# Altium PCB UKU205m3.PcbDoc
Units mm, origin at the board's own origin, x right, y up, seen from the top; angles counter-clockwise.
Board outline 374.65 x 264.35 mm, 2 copper layers (Top Layer, Bottom Layer); 22 components, 433 nets, 213 pads, 41 vias.
Unrouted connection lines stored in the file: 51.
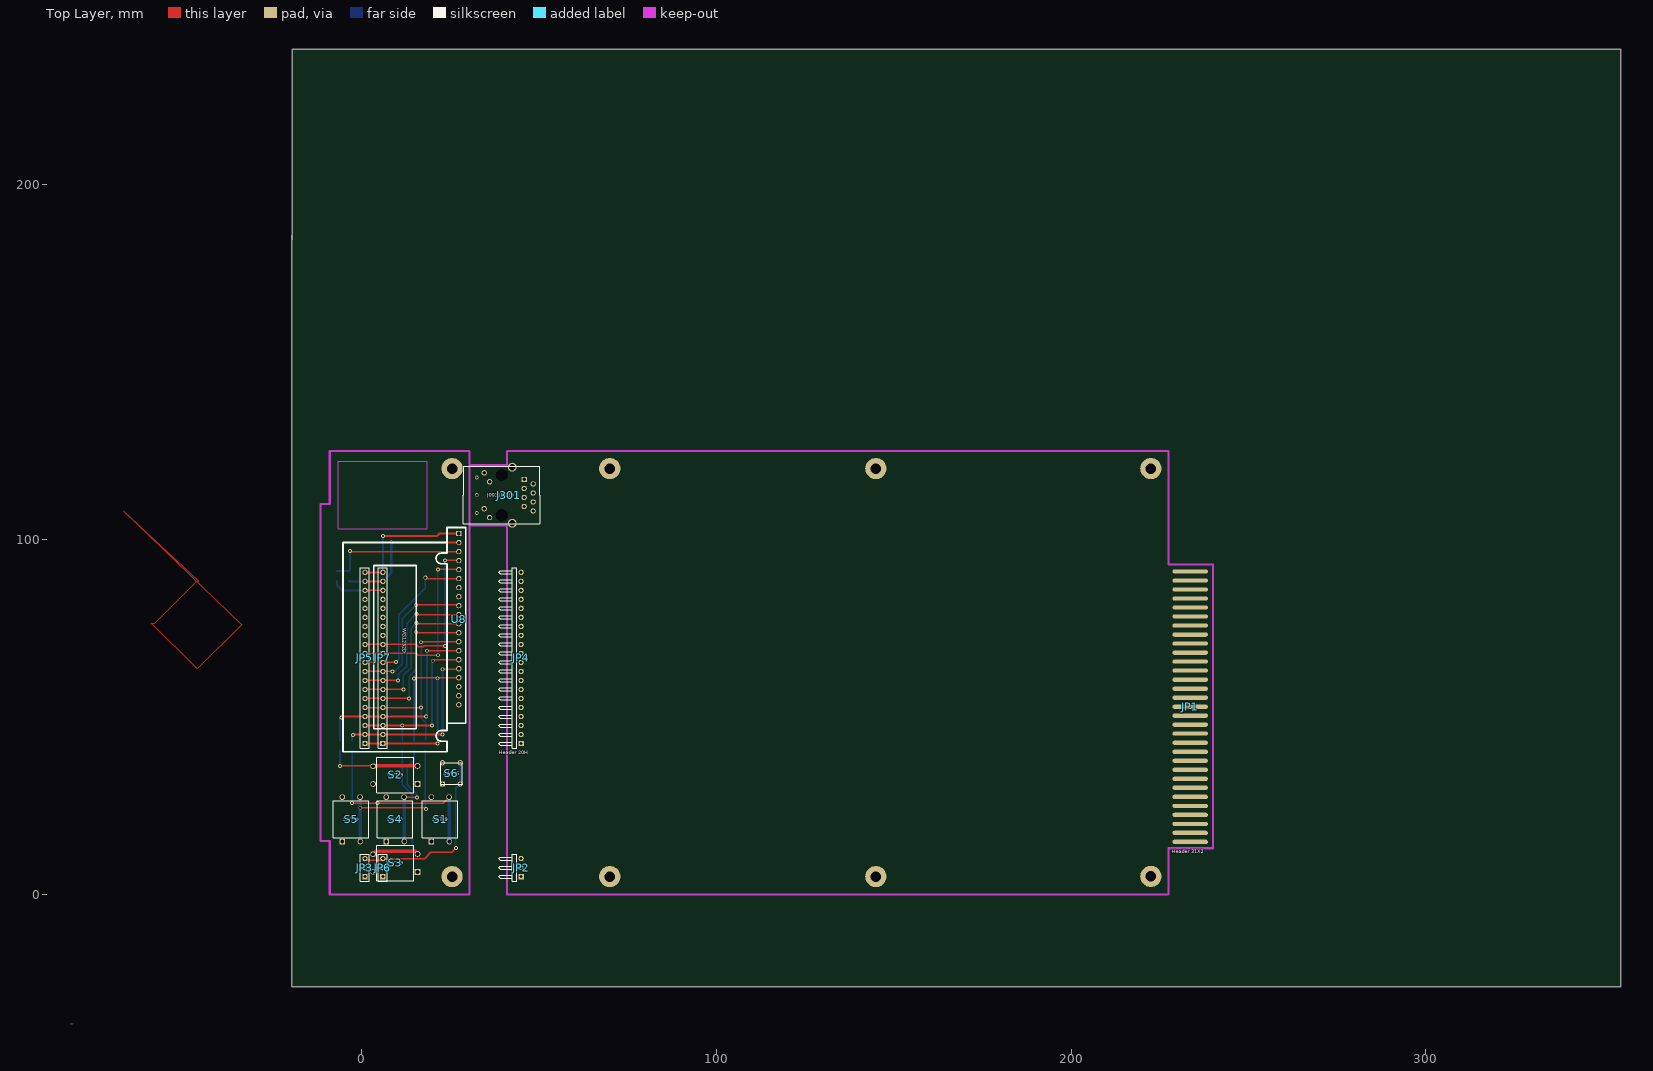
[diagram p0: Top Layer view]
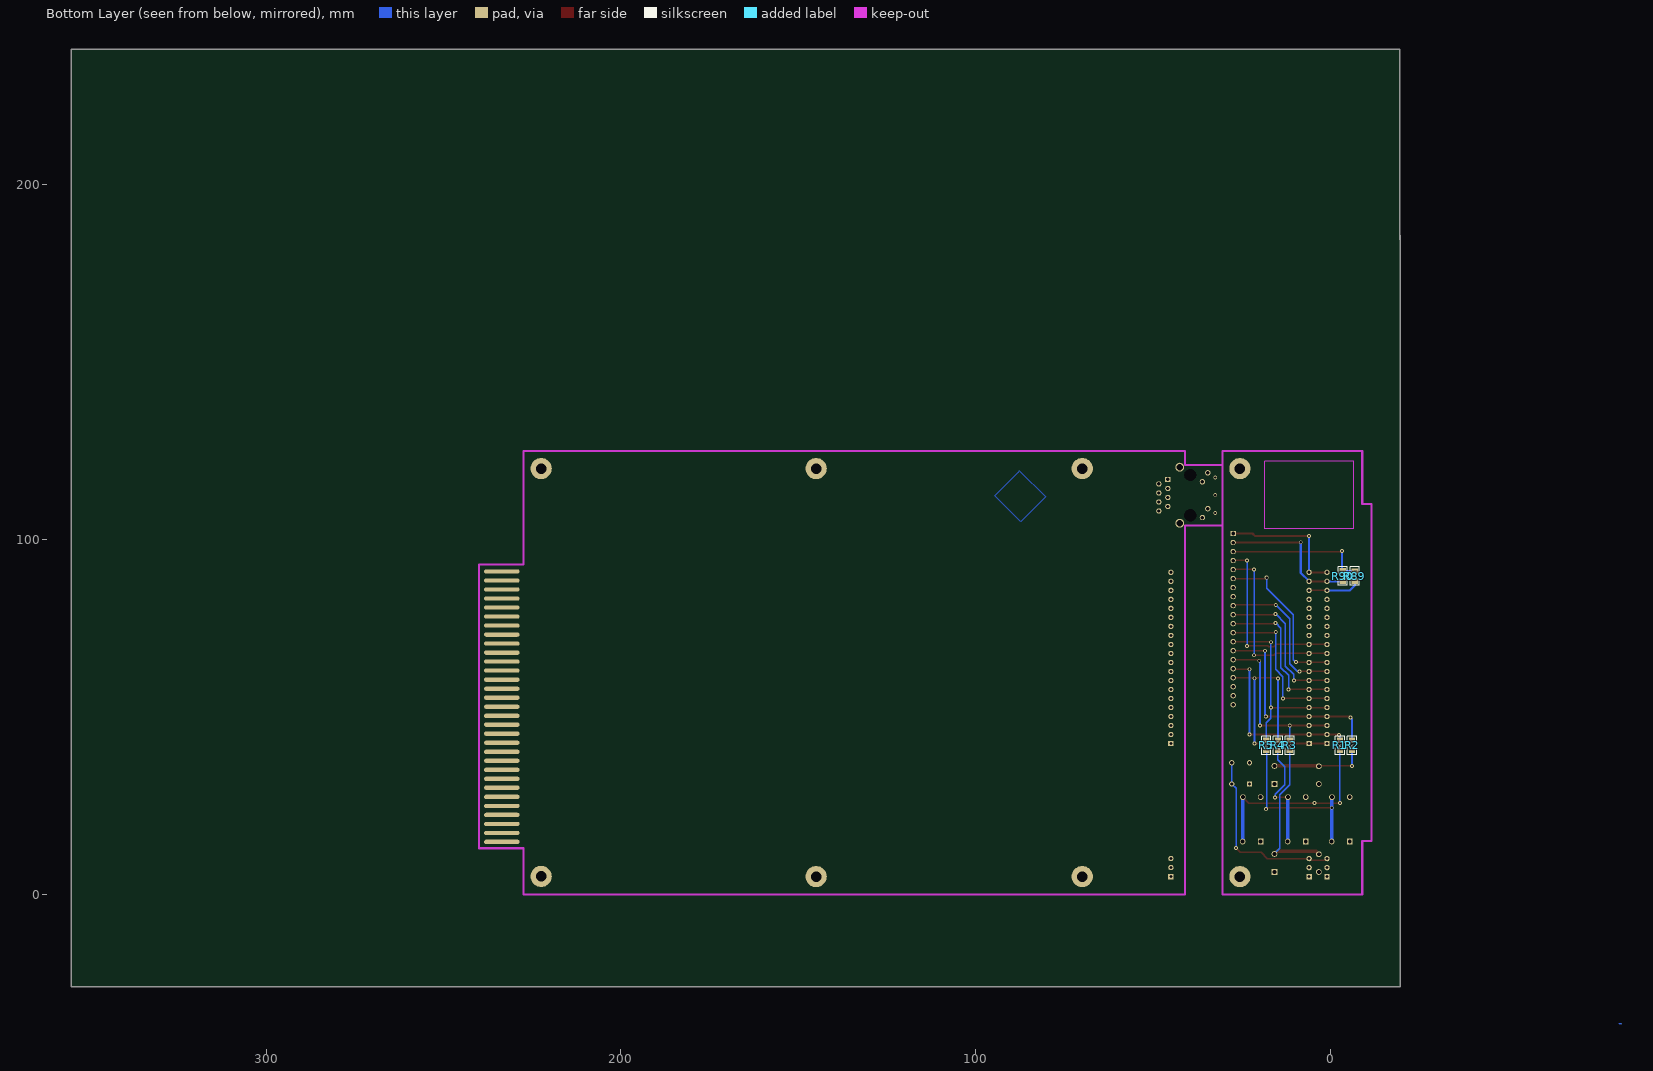
[diagram p1: Bottom Layer view, seen from below]

## Layer stack, top to bottom
Top Layer: signal copper 0.0356
Dielectric: dielectric 0.32, FR-4, Dk 4.8
Bottom Layer: signal copper 0.0356

## Board outline
-19.65,185.8 -19.65,-26.1 355,-26.1 355,238.25 -19.45,238.25 -19.45,184.45

## Design rules (kind name [scope] priority, off if disabled: settings)
Clearance Clearance_1 [InPoly vs InNet('+5VIZ') Or InNet('-5VIZ')] p1: gap=1
Clearance "Для разъёма" [InComponent(JP1)] p2: gap=0.6
Clearance Poly_Poly [InPoly vs InPoly] p3: gap=1
Clearance Keep_Out [OnLayer('Keep-Out Layer') vs Not InNet('NetJ2_5')] p4: gap=1
Clearance Holes [InPoly vs HasPad('Free-0')  Or HasPad('J2-10')  Or HasPad('J2-11')] p5: gap=2
Clearance Poly [InPoly] p6: gap=0.5
Clearance [All] p7: gap=0.15
Clearance Высоковольтное [InNet('+UOUT') or
InNet('U1') or
InNet('U2') or
InNet('UAKB') or
InNet('-UOUT') vs InPoly] p8: gap=0.6
ComponentClearance [All] p1: gap=0.254 collisioncheckmode=0
HoleSize [All] p1: absolutevalues=TRUE maxlimit=5 minlimit=0.025 maxpercent=80.000 minpercent=20.000
PolygonConnect PolygonConnect_2 [InComponent(JP1)] p1: connectstyle=Relief reliefconductorwidth=1 reliefentries=4 polygonreliefangle="90 Angle"
PolygonConnect PolygonConnect_1 [HasPad('JP101-7') or
HasPad('JP6-7') or
HasPad('JP6-9') or
HasPad('JP6-10') Or InComponent(U101)] p2: connectstyle=Direct reliefconductorwidth=0.254 reliefentries=4 polygonreliefangle="90 Angle"
PolygonConnect [All] p3: connectstyle=Relief reliefconductorwidth=0.5 reliefentries=4 polygonreliefangle="90 Angle"
RoutingLayers [All] p1: top layer=Horizontal bottom layer=Vertical
RoutingVias [All] p1: holewidth=0.6 width=1.1 viastyle="Through Hole" minholewidth=0.6 minwidth=1.1 maxholewidth=0.7 maxwidth=1.2
SolderMaskExpansion [All] p1: expansion=0.102
TestPointUsage [All] p1: valid=0 allowmultiple=FALSE
Testpoint [All] p1: side=15 testpointundercomponent=TRUE minsize=1.016 maxsize=2.54 preferedsize=1.524 minholesize=0 maxholesize=1.016 preferedholesize=0.813 testpointgrid=0.025 style=1023 order=1234567890
Width [All] p1: maxlimit=2 minlimit=0.2 preferedwidth=0.254 toplayer_prefwidth=0.5 bottomlayer_prefwidth=0.4 minimp=50.000000 maximp=50.000000 favimp=50.000000
15 further rules are at their usual default settings.

## Classes and differential pairs
component class RS232: R72 R73 U5
component class FACE: JP3 JP5 JP6 JP7 R1 R2 R3 R4 R5 R89 R90 S1 S2 S3 S4 S5 S6 TX0 U8

## Components (designator, comment, footprint, x,y, rotation, side; value= is the part's Value field where it differs from the comment)
J301 "J0011D21B" J0011D21B 39.5,112.5 r90 top
JP1 "Header 31X2" sl-62f 233.6,91 r270 top
JP2 "Header 3H" HDR1X3H 45,5 r90 top
JP3 "Header 3" HDR1X3 1,5 r90 top
JP4 "Header 20H" HDR1X20H 45,42.5 r90 top
JP5 "Header 20" HDR1X20 1,42.5 r90 top
JP6 "Header 3" HDR1X3 6.05,5 r90 top
JP7 "Header 20" HDR1X20 6.05,42.5 r90 top
R1 "2K7" _1206 -2.65,42 r90 bottom
R2 "2K7" _1206 -6.05,42 r90 bottom
R3 "2K7" _1206 11.516,42 r90 bottom
R4 "2K7" _1206 14.824,42 r90 bottom
R5 "2K7" _1206 18.132,42 r90 bottom
R89 "7K5" _1206 -6.85,89.7 r90 bottom
R90 "2K2" _1206 -3.45,89.7 r270 bottom
S1 "SWT-9" SWT-9 19.7,14.9 r90 top
S2 "SWT-9" SWT-9 15.8,31.1 r180 top
S3 "SWT-9" SWT-9 15.8,6.3 r180 top
S4 "SWT-9" SWT-9 7,14.9 r90 top
S5 "SWT-9" SWT-9 -5.4,14.9 r90 top
S6 "SWT-6" SWT-6 22.85,31.1 r90 top
U8 "WG1232D" WG1232D 9.45,69.7 r270 top

## Footprints (in the part's own frame and the unit in brackets; to place one, negate y for a bottom-side part, rotate by r counter-clockwise, add the part's x,y. Pads: shape width x height; smd on the part's side, far side on the other; paste and mask are expansions set on the pad)
_1206 [mm]
  rect 1.6x1.8 smd: 1(-1.412,-0.007) 2(1.388,-0.007)
  silkscreen extent -2.61,-1.31 2.59,1.29
HDR1X3 [mm]
  rect 1.5x1.5 hole 0.9: 1(-0.009,0.011)
  round 1.5 hole 0.9: 2(2.531,0.011) 3(5.071,0.011)
  silkscreen extent -1.28,-1.26 6.34,1.28
HDR1X3H [mm]
  rect 1.5x1.5 hole 0.9: 1(0,0)
  round 1.5 hole 0.9: 2(2.54,0) 3(5.08,0)
  silkscreen extent -1.27,1.27 6.35,6.35
HDR1X20 [mm]
  rect 1.5x1.5 hole 0.9: 1(0,0)
  round 1.5 hole 0.9: 2(2.54,0) 3(5.08,0) 4(7.62,0) 5(10.16,0) 6(12.7,0) 7(15.24,0) 8(17.78,0) 9(20.32,0) 10(22.86,0) 11(25.4,0) 12(27.94,0) 13(30.48,0) 14(33.02,0) 15(35.56,0) 16(38.1,0) 17(40.64,0) 18(43.18,0) 19(45.72,0) 20(48.26,0)
  silkscreen extent -1.27,-1.27 49.53,1.27
HDR1X20H [mm]
  rect 1.5x1.5 hole 0.9: 1(0,0)
  round 1.5 hole 0.9: 2(2.54,0) 3(5.08,0) 4(7.62,0) 5(10.16,0) 6(12.7,0) 7(15.24,0) 8(17.78,0) 9(20.32,0) 10(22.86,0) 11(25.4,0) 12(27.94,0) 13(30.48,0) 14(33.02,0) 15(35.56,0) 16(38.1,0) 17(40.64,0) 18(43.18,0) 19(45.72,0) 20(48.26,0)
  silkscreen extent -1.27,1.27 49.53,6.35
J0011D21B [mm]
  round 2.5 hole 1.8: 0(-7.9,-3) 0(7.9,-3)
  round 1.5 hole 3.5: 0(-5.7,0) 0(5.7,0)
  rect 1.5x1.5 hole 0.95: 1(4.445,-6.35)
  round 1.5 hole 0.95: 2(3.175,-8.9) 3(1.905,-6.35) 4(0.635,-8.9) 5(-0.635,-6.35) 6(-1.905,-8.9) 7(-3.175,-6.35) 8(-4.445,-8.9) 9(6.31,4.9) 10(3.77,3.38) 11(-3.8,4.9) 12(-6.31,3.38)
  silkscreen extent -8.1,-10.8 8.1,10.8
sl-62f [mm]
  oval 1.2x10 smd: 1(0,-0.011) 3(2.55,-0.011) 5(5.075,-0.011) 7(7.625,-0.011) 9(10.15,-0.011) 11(12.675,-0.011) 13(15.25,-0.011) 15(17.8,-0.011) 17(20.325,-0.011) 19(22.875,-0.011) 21(25.4,-0.011) 23(27.925,-0.011) 25(30.5,-0.011) 27(33.05,-0.011) 29(35.575,-0.011) 31(38.125,-0.011) 33(40.65,-0.011) 35(43.175,-0.011) 37(45.7,-0.011) 39(48.275,-0.011) 41(50.825,-0.011) 43(53.35,-0.011) 45(55.9,-0.011) 47(58.425,-0.011) 49(60.95,-0.011) 51(63.525,-0.011) 53(66.075,-0.011) 55(68.6,-0.011) 57(71.15,-0.011) 59(73.675,-0.011) 61(76.2,-0.011)
  oval 1.2x10 smd far side: 2(0,-0.011) 4(2.55,-0.011) 6(5.075,-0.011) 8(7.625,-0.011) 10(10.15,-0.011) 12(12.7,-0.011) 14(15.25,-0.011) 16(17.8,-0.011) 18(20.325,-0.011) 20(22.875,-0.011) 22(25.4,-0.011) 24(27.925,-0.011) 26(30.5,-0.011) 28(33.05,-0.011) 30(35.575,-0.011) 32(38.125,-0.011) 34(40.675,-0.011) 36(43.175,-0.011) 38(45.725,-0.011) 40(48.275,-0.011) 42(50.825,-0.011) 44(53.35,-0.011) 46(55.9,-0.011) 48(58.425,-0.011) 50(60.95,-0.011) 52(63.525,-0.011) 54(66.075,-0.011) 56(68.6,-0.011) 58(71.15,-0.011) 60(73.7,-0.011) 62(76.2,-0.011)
SWT-6 [mm]
  rect 1.5x1.5 hole 0.95: 1(-0.009,-0.001)
  round 1.5 hole 0.95: 1(5.991,-0.001) 2(-0.009,-5.001) 2(5.991,-5.001)
  silkscreen extent -0.01,-5.5 5.99,0.5
SWT-9 [mm]
  rect 1.6x1.6 hole 1.1: 1(-0.009,-0.003)
  round 1.6 hole 1.1: 1(12.491,-0.003) 2(-0.009,-5.083) 2(12.491,-5.003)
  silkscreen extent 0.99,-7.5 11.49,2.5
WG1232D [mm]
  rect 1.5x1.5 hole 1: 1(-32,18)
  round 1.5 hole 1: 2(-29.46,18) 3(-26.92,18) 4(-24.38,18) 5(-21.84,18) 6(-19.3,18) 7(-16.76,18) 8(-14.22,18) 9(-11.68,18) 10(-9.14,18) 11(-6.6,18) 12(-4.06,18) 13(-1.52,18) 14(1.02,18) 15(3.56,18) 16(6.1,18) 17(8.64,18) 18(11.18,18) 19(13.72,18) 20(16.26,18)
  silkscreen extent -33.72,-14.62 29.51,19.95

## Part data
JP1: "Header, 30-Pin, Dual row"
JP2: "Header, 3-Pin,  Right Angle"
JP3 JP6: "Header, 3-Pin"
JP4: library part "Header 15H", "Header, 15-Pin, Right Angle"
JP5: library part "Header 15", "Header, 15-Pin"
JP7: "Header, 20-Pin"
R1 R2 R3 R4 R5 R89 R90: library part Res2, "Resistor"
S1 S2 S3 S4 S5: "Switch"
S6: library part SWT-9, "Button"
U8: library part WG1232D_pereh

## Free pads (board coordinates)
  round 6 hole 3: 0(25.55,5) 0(25.55,120) 0(70,5) 0(70,120) 0(145,5) 0(145,120) 0(222.5,5.05) 0(222.5,120)

## Via types
v1: diameter 1.1, hole 0.6, Top Layer to Bottom Layer, 41 vias

## Nets (pads, with @x,y where several pads share a name; then routed paths per layer and width w, separated by ;. In a path a pad name is that pad's centre, name@x,y a point inside that pad or via, vN(x,y) a via of type N, cw(c..) or ccw(c..) an arc to the next point about the centre after c; other vN are vias at no path point)
+3V3: J301.4 J301.5 J301.9 J301.12 JP1.21 JP1.22
+3V3A: 
+5V: JP1.19 JP1.20 JP4.19
+48V: JP1.5 JP1.6
+IAKB: JP1.39 JP1.40
+UOUT: 
-5V: JP4.18
-5V_IZ: 
-48V: JP1.1 JP1.2
-IAKB: JP1.37 JP1.38
-UOUT: 
CANH: JP1.27
CANL: JP1.28
DB4: 
GND: J301.8 JP1.11 JP1.12 JP1.13 JP1.14 JP1.59 JP1.60 JP1.61 JP1.62 JP2.1 JP2.2 JP4.20
  other v1: 32.5,107.5 32.5,112.5 32.5,117.5
I1: JP1.47
I2: JP1.48
NetA1_1: 
NetA1_2: 
NetBT1_1: 
NetC9_1: 
NetC18_1: 
NetC22_2: 
NetC23_1: 
NetC24_2: 
NetC26_1: 
NetC26_2: 
NetC27_1: 
NetC29_1: 
NetC29_2: 
NetC30_1: 
NetC32_1: 
NetC35_1: 
NetC100_1: 
NetC101_1: 
NetC103_1: 
NetC103_2: 
NetC104_2: 
NetC111_1: 
NetC111_2: 
NetC114_1: 
NetC117_1: 
NetD101_1: 
NetD101_2: 
NetD102_1: 
NetD103_1: 
NetJ301_1: J301.1
NetJ301_2: J301.2
NetJ301_3: J301.3
NetJ301_6: J301.6
NetJ301_10: J301.10
NetJ301_11: J301.11
NetJP1_16: JP1.16
NetJP1_29: JP1.29
NetJP3_1: JP3.1 JP3.2 JP5.13 JP5.14 JP5.15 JP5.16 JP5.17 JP5.20 JP6.1 JP6.2 JP7.13 JP7.14 JP7.15 JP7.16 JP7.17 JP7.20 S1.1 S2.1 S3.1 S4.1 S5.1 S6.1 U8.1 | length 37
  Top Layer w0.6: JP5.20 JP7.20 ; v1(6.05,100.95) 21.25,100.95 22,101.7 U8.1
  Bottom Layer w0.6: JP7.20 v1(6.05,100.95)
NetJP3_3: JP3.3 JP6.3 S6.2 | length 51.2
  Top Layer w0.4: JP3.3@1.46,9.6 5.568,9.6 JP6.3 10.971,10.071 11,10.1 17.8,10.1 19.6,11.9 25.5,11.9 v1(26.65,13.05)
  Bottom Layer w0.4: v1(26.65,13.05) 26.65,29.89 27.851,31.091 S6.2@27.851,37.091
NetJP4_15: JP4.15
NetJP5_1: JP5.1 JP7.1 R4.2 U8.17 | length 69.2
  Top Layer w0.5: JP5.1 v1(21.4,42.5) ; v1(14.85,60.85) 15.06,61.06 U8.17 ; v1(21.4,60.9) v1@21.56,61.06
  Bottom Layer w0.5: R4.2 14.817,60.817 v1(14.85,60.85) ; v1(21.4,42.5) v1(21.4,60.9)
NetJP5_2: JP5.2 JP7.2 R1.2 U8.16 | length 50
  Top Layer w0.5: v1(-2.4,44.95) -2.31,45.04 22.84,45.04 v1(22.85,45.05) ; v1(22.85,63.45) 27.3,63.45 U8.16
  Bottom Layer w0.5: R1.2 -2.657,44.693 v1(-2.4,44.95) ; v1(22.85,45.05) v1(22.85,63.45)
NetJP5_3: JP5.3 JP7.3 R3.2 U8.15 | length 48.9
  Top Layer w0.5: JP5.3 19.88,47.58 v1(19.9,47.6) ; v1(20.1,65.85) 20.39,66.14 U8.15
  Bottom Layer w0.5: v1(11.5,47.55) 11.509,47.541 R3.2 ; v1(19.9,47.6) 19.9,65.65 v1(20.1,65.85)
NetJP5_4: JP5.4 JP7.4 R2.2 U8.14 | length 58.2
  Top Layer w0.5: v1(-5.65,49.8) -5.33,50.12 18.23,50.12 v1(18.25,50.1) ; v1(18.5,68.65) 18.53,68.68 U8.14
  Bottom Layer w0.5: R2.2 -6.057,49.393 v1(-5.65,49.8) ; v1(18.25,50.1) 18.5,50.35 v1(18.5,68.65)
NetJP5_5: JP5.5 JP7.5 R5.2 U8.13 | length 54.7
  Top Layer w0.4: JP5.5 v1(16.79,52.66) v1@16.8,52.65 ; v1(16.8,71.05) 16.97,71.22 U8.13
  Bottom Layer w0.4: v1(16.8,71.05) 16.8,49.65 18.125,48.325 R5.2
NetJP5_6: JP5.6 JP7.6 U8.12 | length 44.1
  Top Layer w0.4: JP5.6 v1(13.45,55.2) ; v1(15.45,73.9) 15.59,73.76 U8.12
  Bottom Layer w0.4: v1(13.45,55.2) 13.45,61.35 15.5,63.4 15.5,73.85 v1(15.45,73.9)
NetJP5_7: JP5.7 JP7.7 U8.11 | length 43.1
  Top Layer w0.4: JP5.7 11.84,57.74 v1(11.85,57.75) ; v1(15.5,76.5) 15.7,76.3 U8.11
  Bottom Layer w0.4: v1(11.85,57.75) 11.85,61.7 14.05,63.9 14.05,75.05 v1(15.5,76.5)
NetJP5_8: JP5.8 JP7.8 U8.10 | length 42.3
  Top Layer w0.4: JP5.8 10.33,60.28 v1(10.35,60.3) ; v1(15.5,79.05) 15.71,78.84 U8.10
  Bottom Layer w0.4: v1(10.35,60.3) 10.35,62 12.7,64.35 12.7,76.25 v1(15.5,79.05)
NetJP5_9: JP5.9 JP7.9 U8.9 | length 42
  Top Layer w0.4: JP5.9 8.87,62.82 8.9,62.85 v1(8.8,62.85) ; v1(15.45,81.6) 27.23,81.6 U8.9
  Bottom Layer w0.4: v1(8.8,62.85) 9.4,62.85 11.55,65 11.55,77.7 v1(15.45,81.6)
NetJP5_10: JP5.10 JP7.10 U8.6 | length 45.6
  Top Layer w0.4: JP5.10 9.66,65.36 v1(9.75,65.45) ; v1(18,89.25) 18.25,89 U8.6
  Bottom Layer w0.4: v1(9.75,65.45) 10.45,66.15 10.45,78.75 18,86.3 v1(18,89.25)
NetJP5_11: JP5.11 JP7.11 U8.5 | length 50.9
  Top Layer w0.4: JP5.11 15.45,67.9 15.95,67.4 v1(21.55,67.4) ; v1(21.55,91.6) 27.39,91.6 U8.5
  Bottom Layer w0.4: v1(21.55,67.4) v1(21.55,91.6)
NetJP5_12: JP5.12 JP7.12 U8.4 | length 50.9
  Top Layer w0.4: JP5.12 15.31,70.44 16,69.75 17.4,69.75 17.65,70 v1(23.55,70) ; v1(23.6,94.1) 27.43,94.1 U8.4
  Bottom Layer w0.4: v1(23.55,70) 23.55,94.05 v1(23.6,94.1)
NetJP5_18: JP5.18 JP7.18 R89.1 | length 14.7
  Top Layer w0.5: JP5.18 JP7.18
  Bottom Layer w0.6: R89.1 -6.857,87.057 -5.48,85.68 JP5.18
NetJP5_19: JP5.19 JP7.19 R90.2 U8.2 | length 40.6
  Top Layer w0.6: JP5.19 JP7.19 ; v1(8.4,99.25) 8.49,99.16 U8.2
  Bottom Layer w0.6: R90.2 -3.351,88.22 JP5.19 ; JP7.19 8.4,90.57 v1(8.4,99.25)
NetJP8_1: 
NetK1_5: 
NetQ1_1: 
NetQ5_2: 
NetQ6_1: 
NetQ100_1: 
NetQ101_1: 
NetR1_1: R1.1 S1.2 | length 55.6
  Top Layer w0.4: v1(-2.65,25.7) 23.012,25.7 S1.2@24.703,27.391
  Bottom Layer w0.4: R1.1 -2.65,40.581 v1(-2.65,25.7)
  Bottom Layer w1: S1.2@24.7,27.5 24.756,27.444 24.783,27.417 S1.2@24.783,14.891
  other v1: 4.55,25.7
NetR2_1: R2.1 S2.2 | length 26.3
  Top Layer w0.5: v1(-6.05,36.2) -6,36.25 3.162,36.25 S2.2@3.309,36.103
  Top Layer w1: S2.2@3.389,36.183 S2.2@15.809,36.183
  Bottom Layer w0.5: R2.1 -6.057,36.207 v1(-6.05,36.2)
NetR3_1: R3.1 S3.2 | length 44.2
  Top Layer w1: S3.2@3.309,11.303 4.206,12.2 14.992,12.2 S3.2@15.809,11.383
  Bottom Layer w0.4: R3.1 11.509,30.841 14.25,28.1 14.25,12.942 S3.2@15.809,11.383
NetR4_1: R4.1 S4.2 | length 31.5
  Top Layer w0.4: S4.2@12.003,27.391 12.094,27.3 v1(15.65,27.3)
  Bottom Layer w0.4: R4.1 14.817,37.917 12.85,35.95 12.85,30.95 15.65,28.15 v1(15.65,27.3)
  Bottom Layer w1: S4.2@12.003,27.391 12.003,14.971 S4.2@12.083,14.891
NetR5_1: R5.1 S5.2 | length 48.6
  Top Layer w0.4: S5.2@-0.397,27.391 S5.2@0.359,27.391 ; v1(-0.35,24.4) -0.3,24.35 17.85,24.35 v1(18.2,24)
  Bottom Layer w0.4: R5.1@18,40.55 18,24.2 v1(18.2,24)
  Bottom Layer w1: S5.2@-0.4,27.35 -0.317,27.267 S5.2@-0.317,14.891
NetR33_1: 
NetR37_1: 
NetR38_1: 
NetR39_1: 
NetR40_2: 
NetR41_2: 
NetR42_1: 
NetR43_2: 
NetR44_1: 
NetR45_1: 
NetR49_2: 
NetR52_2: 
NetR72_1: 
NetR73_2: 
NetR89_2: R89.2 R90.1 U8.3 | length 39.9
  Top Layer w0.4: v1(-3.2,96.75) -3.07,96.62 U8.3
  Bottom Layer w0.6: R89.2 -3.468,91.088 -3.2,91.356 v1(-3.2,96.75)
NetR92_2: 
NetR94_2: 
NetR96_2: 
NetR98_2: 
NetR104_1: 
NetR105_2: 
NetR110_1: 
NetT100_7: 
NetT100_8: 
NetT100_10: 
NetU2_1: 
NetU2_5: 
NetU2_6: 
NetU2_7: 
NetU2_8: 
NetU2_9: 
NetU2_10: 
NetU2_16: 
NetU2_17: 
NetU13_3: 
NetU16_4: 
OFF1: JP1.25
OFF2: JP1.26
P0_0: 
P0_1: 
P0_2: 
P0_3: 
P0_5: 
P0_6: 
P0_7: 
P0_8: 
P0_9: 
P0_10: 
P0_15: 
P0_17: 
P0_18: 
P0_19: 
P0_20: 
P0_21: 
P0_22: 
P0_23: 
P0_24: 
P0_25: 
P0_26: 
P0_27: 
P0_29: JP4.12
P0_30: JP4.11
P1_0: 
P1_1: 
P1_4: 
P1_8: 
P1_9: 
P1_10: 
P1_14: 
P1_15: 
P1_16: 
P1_17: 
P1_18: JP4.8
P1_19: JP4.7
P1_20: JP4.6
P1_21: JP4.5
P1_22: JP4.4
P1_23: JP4.3
P1_24: JP4.2
P1_25: JP4.1
P1_26: JP4.10
P1_27: JP4.9
P1_30: 
P1_31: 
P2_0: 
P2_1: 
P2_6: 
P2_7: 
P2_8: 
P2_9: 
P2_10: 
P2_11: 
P2_12: 
P2_13: 
P3_25: 
P3_26: 
P4_28: 
P4_29: 
PROG_RESET: 
PROG_SET: 
PWM1: JP1.23
PWM2: JP1.24
R1: JP1.35
R2: JP1.36
R3: JP1.33
R4: JP1.34
RES: 
RES_BUT: JP2.3
RTCX1: 
RTCX2: 
RX0: 
SK1: JP1.7
SK2: JP1.8
SK3: JP1.9
SK4: JP1.10
T1: JP1.45
T2: JP1.46
T3: JP1.43
T3: 
T3: 
T3: 
T4: JP1.44
T5: JP1.41
TD1: 
TX0: 
TX0: 
TX0: 
TX0: 
TX0: 
TX0: 
TX0: 
TX0: 
TX0: 
TX0: 
TX0: 
TX0: 
TX0: 
TX0: 
TX0: 
TX0: 
TX0: 
TX0: 
TX0: 
TX0: 
TX0: 
TX0: 
TX0: 
TX0: 
TX0: 
TX0: 
TX0: 
TX0: 
TX0: 
TX0: 
TX0: 
TX0: 
TX0: 
TX0: 
TX0: 
TX0: 
TX0: 
TX0: 
TX0: 
TX0: 
TX0: 
TX0: 
TX0: 
TX0: 
TX0: 
TX0: 
TX0: 
TX0: 
TX0: 
TX0: 
TX0: 
TX0: 
TX0: 
TX0: 
TX0: 
TX0: 
TX0: 
TX0: 
TX0: 
TX0: 
TX0: 
TX0: 
TX0: 
TX0: 
TX0: 
TX0: 
TX0: 
TX0: 
TX0: 
TX0: 
TX0: 
TX0: 
TX0: 
TX0: 
TX0: 
TX0: 
TX0: 
TX0: 
TX0: 
TX0: 
TX0: 
TX0: 
TX0: 
TX0: 
TX0: 
TX0: 
TX0: 
TX0: 
TX0: 
TX0: 
TX0: 
U1: JP1.57
U2: 
U2: 
U2: 
U2: 
U2: 
U2: 
U2: 
U2: 
U2: 
U2: JP1.58
U3: JP1.55
U4: JP1.56
U5: JP1.53
U6: JP1.54
U7: JP1.51
U8: JP1.52
U9: JP1.49
U10: JP1.50
UAKB: 
UAKB: 
UAKB: 
UAKB: 
UAKB: 
UAKB: 
UAKB: 
UAKB: 
UAKB: 
UAKB: 
UAKB: 
UAKB: 
UAKB: 
UAKB: 
UAKB: 
UAKB: 
UAKB: 
UAKB: 
UAKB: 
UAKB: 
UAKB: 
UAKB: 
UAKB: 
UAKB: 
UAKB: 
UAKB: 
UAKB: 
UAKB: 
UI1: 
UI2: 
US: JP1.17
US1: 
US1: 
US1: 
US1: 
US1: 
US1: 
US1: 
US1: 
US1: 
US1: 
US1: 
US1: 
US1: 
US1: 
US1: 
US1: 
US1: 
US1: 
US1: 
US1: 
US1: 
US1: 
US1: 
US1: 
US1: 
US1: 
US1: 
US1: 
US1: 
US1: 
US1: 
US1: 
USK1: 
USK2: 
USK3: 
USK4: 
UT1: 
UT2: 
UT3: 
UT4: 
UT5: 
UU1: 
UU2: 
UU3: 
UU4: 
UU5: 
UU6: 
UU7: 
UU8: 
UU9: 
UU10: 
VBAT: 
VS: JP1.18
VS: 
VS: 
VS: 
VS: 
VS: 
VS: 
VS: 
VS: 
VS: 
VS: 
VS: 
VS: 
VS: 
VS: 
VS: 
VS: 
VS: 
VS: 
VS: 
VS: 
VS: 
VS: 
VS: 
VS: 
VS: 
VS: 
VS: 
VS: 
VS: 
VS: 
XTAL1: 
XTAL2: 
pads on no net: J301.0 J301.7 JP1.3 JP1.4 JP1.15 JP1.30 JP1.31 JP1.32 JP1.42 JP4.13 JP4.14 JP4.16 JP4.17 U8.7 U8.8 U8.18 U8.19 U8.20
copper on no net: | length 0.4
  Bottom Layer w0.5: -81.85,-36.5 -81.4,-36.5

## Polygon pours and split planes (outlines as drawn)
GND on Top Layer (hatched 90Degree grid 0.1 track 0.3, remove dead copper): -66.93,107.95 -33.713,76.05 -46.25,63.514 -59.186,76.45 -58.236,76.45 -46.436,88.25 -45.913,88.25
GND on Bottom Layer (hatched 90Degree grid 0.1 track 0.3, remove dead copper): 80.314,112.05 87.35,105.014 94.686,112.35 88.036,119 87.878,119 87.673,119.41

## Keep-outs
Keep-Out Layer:
  lines w0.3: -6.5,103 -6.5,122 18.6,122 18.6,103 -6.5,103
  lines w0.6: 30.5,104 41,104 41,0 227.5,0 227.5,13 239.95,13 ; 30.5,122 30.5,0 -8.95,0 -8.95,15 -11.5,15 -11.5,110 -8.95,110 -8.95,125 30.5,125 30.5,121 41,121 41,125 227.4,125 ; 227.5,93 227.5,125 ; 227.55,93 239.95,93 ; 240,13 240,93

## Silkscreen, mask and mechanical layers (free items; w line width, h text height)
Top Solder:
  rectangle: 110.15,105.4 127.4,121.5
Mechanical 1:
  circle w0.254: c-2.876,21.15 r4.876
  circle w0.254: c22.224,21.15 r4.876
  circle w0.254: c9.574,8.8 r4.876
  circle w0.254: c9.524,21.15 r4.876
  circle w0.254: c9.574,33.65 r4.876
  lines w0.3: -18.15,112.5 62.7,112.5
  lines w0.5: -8.5,99.1 -2.45,99.1 ; -6.7,14.9 23.3,14.9 ; -6.7,27.4 23.3,27.4 ; -5.15,95.2 -5.15,101.6 -5.1,101.65 ; 3.3,4.9 3.3,34.9 ; 15.8,4.9 15.8,34.9
Mechanical 3:
  lines w0.25: -51.44,-1.96 -49.75,-1.96 -49.75,-3.57
  lines w0.3: 91.4,92.85 91.4,99.6 119.7,99.6 119.7,92.85 ; 93.9,92.85 93.9,99.6 ; 104.4,-1.6 104.4,45.7 ; 117.2,92.85 117.2,99.6

## Dimensions
-11.5,15 to -2.876,16.274 on Mechanical 1
-8.95,125 to 4.697,33.65 on Mechanical 1
-8.95,125 to 30.5,121 on Mechanical 1
28.7,120.6 to 70,120 on Mechanical 1